# Allegro board t26-3.brd
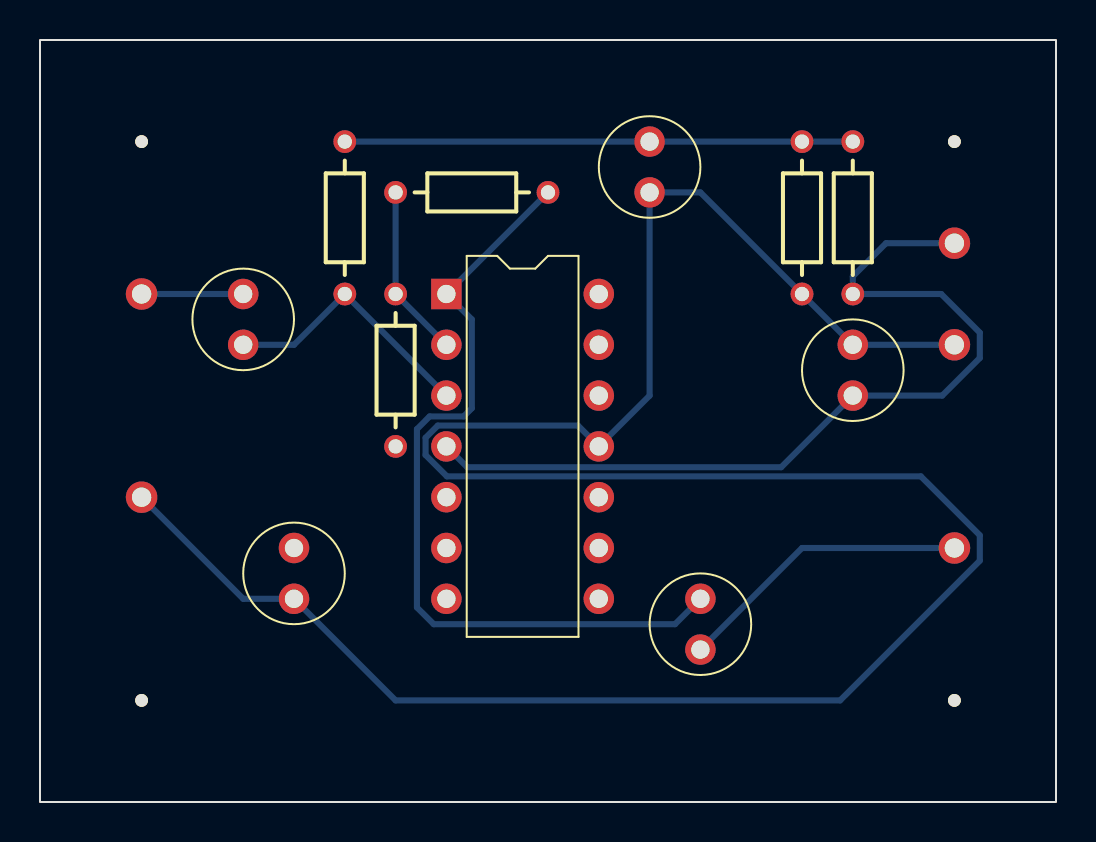
[diagram p0: board, top side]
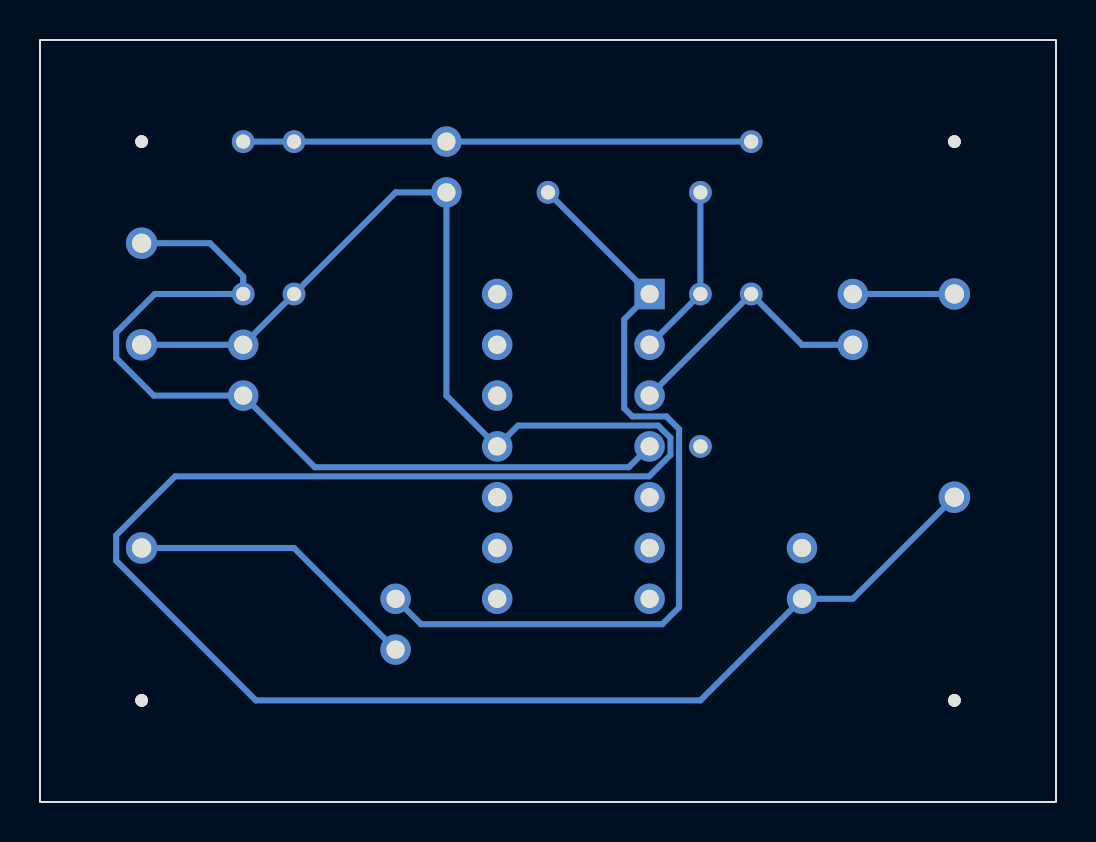
[diagram p1: board, bottom side, seen from below]

Outline 50.8 x 38.1 mm; copper layers: TOP, BOTTOM. Coordinates in mm from the lower left corner of the outline.
Outline path: rectangle 0,0 50.8,38.1

## Design rules (mm)
constraint set DEFAULT: min track width 0.127

## Placement (name value [footprint] x y rotation side)
C1  10uF  [CAP196]  10.16 22.86 0 top
C2  10uF  [CAP196]  12.7 12.7 180 top
C3  10uF  [CAP196]  33.02 10.16 180 top
C4  10uF  [CAP196]  30.48 33.02 180 top
C5  10uF  [CAP196]  40.64 20.32 0 top
J1  CON1  [TESTCOUP]  5.08 25.4 0 top
J2  CON1  [TESTCOUP]  5.08 15.24 0 top
J3  CON1  [TESTCOUP]  45.72 27.94 0 top
J4  CON1  [TESTCOUP]  45.72 12.7 0 top
J5  CON1  [TESTCOUP]  45.72 22.86 0 top
NOREF  -  [unnamed]  45.72 33.02 0 top
NOREF#2  -  [unnamed]  5.08 33.02 0 top
NOREF#3  -  [unnamed]  45.72 5.08 0 top
NOREF#4  -  [unnamed]  5.08 5.08 0 top
R1  10k  [AXRC05]  17.78 17.78 90 top
R2  30k  [AXRC05]  17.78 30.48 0 top
R3  100k  [AXRC05]  15.24 25.4 90 top
R4  33k  [AXRC05]  40.64 25.4 90 top
R5  33k  [AXRC05]  38.1 25.4 90 top
U1  LM324  [DIP14_3]  20.32 25.4 0 top

## Library data of the parts
C1-C5 = C_elect_0: Tolerance: ***; User Part Number: ***
J1-J5 = CON1
R1-R5 = R
U1 = LM324: Tolerance: ***; User Part Number: ***

## Footprints (pads in the part's own frame, mm; a bottom-side part is the same pattern mirrored in y, then rotated)
AXRC05
  round 1.143 hole 0.711: 1(0,0) 2(7.62,0)
CAP196
  round 1.524 hole 0.914: 1(0,0) 2(0,2.54)
DIP14_3
  rect 1.524x1.524 hole 0.914: 1(0,0)
  round 1.524 hole 0.914: 2(0,-2.54) 3(0,-5.08) 4(0,-7.62) 5(0,-10.16) 6(0,-12.7) 7(0,-15.24) 8(7.62,-15.24) 9(7.62,-12.7) 10(7.62,-10.16) 11(7.62,-7.62) 12(7.62,-5.08) 13(7.62,-2.54) 14(7.62,0)
TESTCOUP
  round 1.575 hole 0.965: 1(0,0)
unnamed
  round 0.635 hole 3.175 unplated: (0,0)

## Nets
0: C2.2(-) C4.2(-) C5.2(-) J2.1 J5.1 R5.1 U1.11
N00142: R1.2 R2.1 U1.2
N00146: C3.1 R2.2 U1.1
N00307: C1.1 R3.1 U1.3
N00335: C4.1 R3.2 R4.2 R5.2
N00356: C5.1 J3.1 R4.1 U1.4
N00419: C1.2(-) J1.1
N00423: C2.1 R1.1
N00643: C3.2(-) J4.1

Pads without a net: U1 5 6 7 8 9 10 12 13 14

## Routing (per net, layer and track width the routed paths; a pad name or vN(x,y) marks a point on that pad's centre or on a via; arc(x,y) is an arc through that point)
0: length 122
  BOTTOM w0.305: J5.1 C5.2 R5.1 33.02,30.48 C4.2 30.48,20.32 U1.11 26.9,18.82 19.89,18.82 19.28,18.21 19.28,17.35 20.35,16.28 44.04,16.28 46.99,13.34 46.99,12.06 40.01,5.08 17.78,5.08 C2.2 10.16,10.16 J2.1
N00142: length 8.7
  BOTTOM w0.305: R2.1 R1.2 U1.2
N00146: length 40.6
  BOTTOM w0.305: C3.1 31.75,8.89 19.68,8.89 18.85,9.73 18.85,18.64 19.48,19.28 21.18,19.28 21.59,19.68 21.59,24.13 U1.1 R2.2
N00307: length 13.3
  BOTTOM w0.305: U1.3 R3.1 12.7,22.86 C1.1
N00335: length 25.4
  BOTTOM w0.305: R3.2 C4.1 R5.2 R4.2
N00356: length 44.4
  BOTTOM w0.305: J3.1 42.3,27.94 40.64,26.28 R4.1 45.06,25.4 46.99,23.47 46.99,22.2 45.11,20.32 C5.1 37.06,16.74 21.36,16.74 U1.4
N00419: length 5.1
  BOTTOM w0.305: J1.1 C1.2
N00643: length 14.8
  BOTTOM w0.305: J4.1 38.1,12.7 C3.2
